# EAGLE board apex-alpha-ii-aaa-version (EAGLE 6.3)
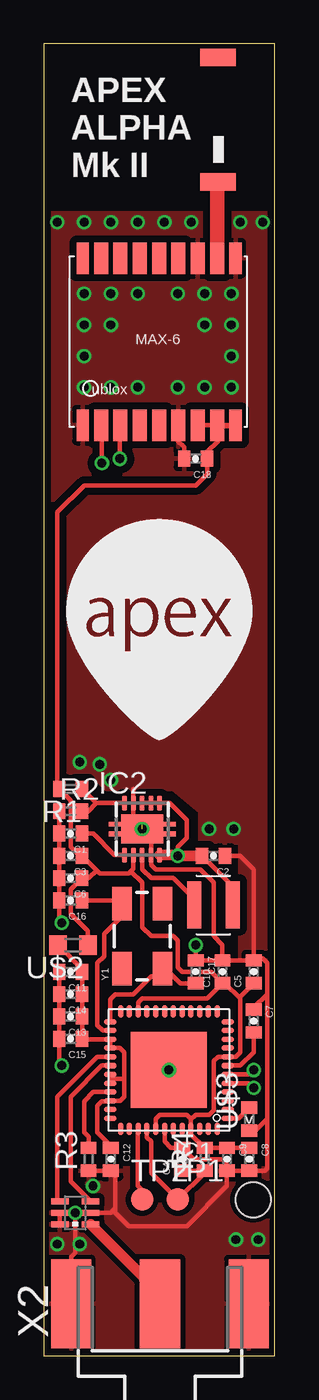
[diagram p0: board, top side]
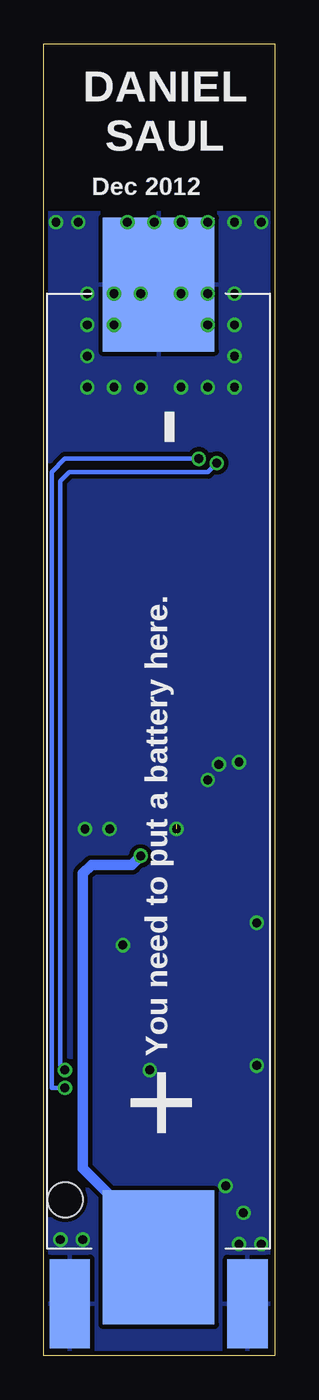
[diagram p1: board, bottom side, seen from below]

Size 13.13 x 74.67 mm. Coordinates in mm from the lower left corner, seen from the top.
Outline: 0,0 13.13,0 13.13,74.67 0,74.67 0,0
Copper layers (1*16): Top 0.035mm / dielectric 1.5mm / Bottom 0.035mm
Design rules "default *": minimum track width 10mil, minimum drill 12mil, track to track 8mil, track to pad 6mil, pad to pad 6mil, via to via 6mil, smd to smd 0mil, copper to edge 10mil, drill to drill 10mil, minimum pad ring 10mil, minimum via ring 6mil, stop-mask expansion 2mil, vias tented up to drill 100mil, thermal gap 10mil

## Footprints (pad centres in the part's own frame; a part is rotated, then mirrored left to right if it is on the bottom)
SMD-BATTERY-HOLDER-AAA = smd 7.62 x 6.35: +V -27.686,0; GND 27.686,0 | hole 2: -24.397,5.309
0402-CAP = smd 0.7 x 0.9: 1 -0.65,0; 2 0.65,0
2450BM15A0002 = smd 0.35 x 1: 1 -0.65,-0.875; 2 0,-0.875; 3 0.65,-0.875; 4 0.65,0.875; 5 0,0.875; 6 -0.65,0.875
UBLOX_MAX-6 = smd 1.8 x 0.7: 1_GND 4.95,-4.4; 9_V_RESET 4.95,4.3; 10_GND -4.55,4.3; 18_RESERVED -4.55,-4.4 | smd 1.8 x 0.8: 2_TXD1 4.95,-3.35; 3_RXD1 4.95,-2.25; 4_TIMEPULSE 4.95,-1.15; 5_EXTINT0 4.95,-0.05; 6_V_BCKP 4.95,1.05; 7_VCC_IO 4.95,2.15; 8_VCC 4.95,3.25; 11_RF_IN -4.55,3.25; 12_GND -4.55,2.15; 13_ANTON -4.55,1.05; 14_VCC_RF -4.55,-0.05; 15_RESERVED -4.55,-1.15; 16_SDA2 -4.55,-2.25; 17_SCL2 -4.55,-3.35
RGZ48 = smd 0.7 x 0.3: 1 -3.35,2.75; 2 -3.35,2.25; 3 -3.35,1.75; 4 -3.35,1.25; 5 -3.35,0.75; 6 -3.35,0.25; 7 -3.35,-0.25; 8 -3.35,-0.75; 9 -3.35,-1.25; 10 -3.35,-1.75; 11 -3.35,-2.25; 12 -3.35,-2.75; 25 3.35,-2.75; 26 3.35,-2.25; 27 3.35,-1.75; 28 3.35,-1.25; 29 3.35,-0.75; 30 3.35,-0.25; 31 3.35,0.25; 32 3.35,0.75; 33 3.35,1.25; 34 3.35,1.75; 35 3.35,2.25; 36 3.35,2.75 | smd 0.3 x 0.7: 13 -2.75,-3.35; 14 -2.25,-3.35; 15 -1.75,-3.35; 16 -1.25,-3.35; 17 -0.75,-3.35; 18 -0.25,-3.35; 19 0.25,-3.35; 20 0.75,-3.35; 21 1.25,-3.35; 22 1.75,-3.35; 23 2.25,-3.35; 24 2.75,-3.35; 37 2.75,3.35; 38 2.25,3.35; 39 1.75,3.35; 40 1.25,3.35; 41 0.75,3.35; 42 0.25,3.35; 43 -0.25,3.35; 44 -0.75,3.35; 45 -1.25,3.35; 46 -1.75,3.35; 47 -2.25,3.35; 48 -2.75,3.35 | smd 4.318 x 4.318: TP 0,0
S-PDSO-N10 = smd 0.28 x 0.85: 1 -1,-1.475; 2 -0.5,-1.475; 3 0,-1.475; 4 0.5,-1.475; 5 1,-1.475; 6 1,1.475; 7 0.5,1.475; 8 0,1.475; 9 -0.5,1.475; 10 -1,1.475 | smd 2.4 x 1.65: PP 0,0 | smd 3.8 x 0.28: PP@1 0,0.275; PP@2 0,-0.275
NR3015 = smd 0.8 x 2.7: P$1 1.1,0; P$2 -1.1,0
R0402 = smd 0.7 x 0.9: 1 -0.65,0; 2 0.65,0
B1,27 = smd 1.27 x 1.27: TP 0,0
JTI_ANTENNA-1575AT43A40 = smd 1 x 2: FEED -3.81,-1.27; NC 3.29,-1.27
R0603 = smd 1 x 1.1: 1 -0.85,0; 2 0.85,0
J502-ND-142-0701-801/806 = smd 5.08 x 2.286: 1 2.565,0; G@1 2.565,5.055; G@2 2.565,-5.055 | smd 5.08 x 2.286 bottom: G@3 2.565,5.055; G@4 2.565,-5.055
CRYSTAL-SMD-5X3 = smd 1.9 x 1.1: 1 -1.85,-1.15; 2 1.85,-1.15; 3 1.85,1.15; 4 -1.85,1.15

## Placement (x,y rotation side)
AAA  [SMD-BATTERY-HOLDER-AAA]  6.6,33.27 90 bottom
C1  1uF  [0402-CAP]  1.52,29.72 180 top
C2  10uF  [0402-CAP]  9.65,28.45 180 top
C3  10uF  [0402-CAP]  1.52,28.45 180 top
C4  2.2nF  [0402-CAP]  7.87,11.18 90 top
C5  100nF  [0402-CAP]  11.94,21.84 90 top
C6  100nF  [0402-CAP]  1.52,27.18 180 top
C7  470nF  [0402-CAP]  11.94,19.05 270 top
C8  100nF  [0402-CAP]  11.68,11.18 270 top
C9  10uF  [0402-CAP]  10.41,11.18 270 top
C10  10uF  [0402-CAP]  10.16,21.84 90 top
C11  100nF  [0402-CAP]  1.52,21.84 180 top
C12  100nF  [0402-CAP]  3.81,11.18 270 top
C13  100nF  [0402-CAP]  1.52,19.3 180 top
C14  2pF  [0402-CAP]  1.52,20.57 180 top
C15  2pF  [0402-CAP]  1.52,18.03 180 top
C16  27pF  [0402-CAP]  1.52,25.91 180 top
C17  27pF  [0402-CAP]  8.64,21.84 270 top
C18  100nF  [0402-CAP]  8.64,51.05 180 top
F1  0433BM15A0001  [2450BM15A0002]  1.78,8.13 90 top
GPS  UBLOX_MAX-6  [UBLOX_MAX-6]  6.6,57.91 270 top
IC1  CC430F5135  [RGZ48]  7.11,16.26 180 top
IC2  TPS61200  [S-PDSO-N10]  5.59,29.97 0 top
NR3015  2.2uH  [NR3015]  9.65,25.65 0 top
R1  560k  [R0402]  1.52,32.26 180 top
R2  200k  [R0402]  1.52,30.99 0 top
R3  56k  [R0402]  2.54,11.18 90 top
R4  47k  [R0402]  9.14,11.18 90 top
TP1  PTR1B1,27  [B1,27]  7.62,8.89 0 top
TP2  PTR1B1,27  [B1,27]  5.59,8.89 0 top
U$1  JTI_ANTENNA-1575AT43A40  [JTI_ANTENNA-1575AT43A40]  8.64,70.61 90 top
U$2  EXC3BB601H  [R0603]  1.65,23.37 180 top
U$3  STATUS  [R0402]  11.68,13.46 90 top
U$4  [APEXHAB-LOGO-SMALL]  1.27,35.05 0 top
X2  [J502-ND-142-0701-801/806]  6.6,0.38 90 top
Y1  26MHz  [CRYSTAL-SMD-5X3]  5.59,23.88 90 top

## Library data of the parts
AAA C1-C18 NR3015 R1-R4 U$2 U$3 = apex
F1 = johanson-technology
GPS U$1 = Ava
IC1 = TI_MSP430_v16
IC2 = texas; MPN: TPS61200DRCT; OC_FARNELL: 1471238; OC_NEWARK: 37M0066
TP1 TP2 = testpad
U$4 = !danielparts
X2 = !danielparts; MF: JOHNSON COMPONENTS; MPN: 142-0701-801; OC_FARNELL: 1608592; OC_NEWARK: 90F2624
Y1 = SparkFun

## Nets
GND: AAA.GND C1.2 C2.1 C3.2 C4.2 C5.2 C6.2 C7.1 C8.2 C9.2 C10.2 C11.2 C12.2 C13.2 C14.2 C15.2 C16.2 C17.1 C18.2 F1.2 F1.5 F1.6 GPS.1_GND GPS.6_V_BCKP GPS.10_GND GPS.12_GND IC1.42 IC1.TP IC2.4 IC2.9 IC2.PP IC2.PP@1 IC2.PP@2 R2.1 R3.1 U$3.1 X2.G@1 X2.G@2 X2.G@3 X2.G@4
GPSRX: GPS.3_RXD1 IC1.5
GPSTX: GPS.2_TXD1 IC1.6
N$1: AAA.+V C2.2 IC2.5 IC2.6 IC2.7 IC2.8 NR3015.P$1
N$2: F1.3 IC1.30
N$3: IC2.3 NR3015.P$2
N$4: IC2.10 R1.1 R2.2
N$5: C1.1 IC2.1
N$6: F1.4 IC1.29
N$7: F1.1 X2.1
N$8: GPS.11_RF_IN U$1.FEED
N$9: IC1.33 R3.2
N$10: C7.2 IC1.7
N$11: C4.1 IC1.40 R4.1 TP1.TP
N$12: IC1.39 TP2.TP
N$13: C17.2 IC1.25 Y1.1
N$14: C16.1 IC1.26 Y1.3
N$15: IC1.1 U$3.2
VCC: C3.1 C5.1 C6.1 C8.1 C9.1 C10.1 C18.1 GPS.7_VCC_IO GPS.8_VCC GPS.9_V_RESET IC1.8 IC1.22 IC1.41 IC1.45 IC2.2 R1.2 R4.2 U$2.1
VEE: C11.1 C12.1 C13.1 C14.1 C15.1 IC1.27 IC1.28 IC1.31 IC1.32 IC1.34 U$2.2

## Tracks (layer width: path | path; a pad name or v marks a point on that pad's centre or on a via)
GND  (via drill 0.51)  (2 unrouted)
  Top 0.254: C18.2 7.99,51.7 7.62,52.07 7.62,52.93 GPS.6_V_BCKP | v1.78,8.13 F1.5 F1.6 | R2.1 C1.2 C3.2 C6.2 C16.2 0.87,24.78 v1.02,24.64 | IC2.4 6.1,29.46 5.09,30.47 IC2.9 5.09,32.25 5.08,32.26 | IC2.PP 5.59,29.72 6.1,29.21 6.1,27.94 6.35,27.69 8.89,27.69 9.65,26.92 9.65,23.88 10.16,23.37 C10.2 | C7.1 11.94,19.81 12.7,20.57 | 12.7,20.57 12.7,22.35 12.45,22.61 12.05,22.61 C5.2 | 6.86,16.01 IC1.TP | 4.06,8.38 3.81,8.13 F1.2 v1.78,8.13 | R3.1 C12.2 4.06,10.27 4.06,8.38 | C9.2 C8.2 | IC1.42 6.86,12.19 7.23,11.83 C4.2 8.52,11.18 10.16,11.18 10.41,10.92 C9.2 | C9.2 12.56,10.53 12.7,10.67 12.7,13.46 | 12.7,13.46 12.7,20.57 | C17.1 8.64,22.61 | 8.64,22.61 v8.64,23.37 | C10.2 C5.2 | X2.G@1 1.55,5.61 1.78,5.84 v1.78,8.13 | 4.06,8.38 4.06,8.13 4.83,7.37 8.13,7.37 10.41,9.65 C9.2 | C10.2 8.75,22.49 8.64,22.61 | C11.2 C14.2 C13.2 C15.2 0.87,16.65 v1.02,16.51 | C2.1 11.18,28.45 11.94,27.69 C5.2 | U$3.1 12.05,12.81 12.7,13.46
  Bottom 0.254: AAA.GND 6.6,60.31 GPS.12_GND
  other vias: 0.76,64.52 2.29,64.52 3.81,64.52 5.33,64.52 6.86,64.52 8.38,64.52 11.18,64.52 12.45,64.52 2.29,60.45 2.29,58.67 2.29,56.9 2.29,55.12 5.33,55.12 7.62,55.12 9.14,55.12 10.67,55.12 10.67,56.9 10.67,58.67 10.67,60.45 3.81,60.45 5.33,60.45 7.62,60.45 9.14,60.45 3.81,58.67 9.14,58.67 3.81,55.12 12.19,6.6 10.92,6.6 0.76,6.35 2.03,6.35 2.79,9.65 7.11,16.26 9.4,29.97 10.79,29.97 3.81,32.77 3.17,33.66 2.03,33.78 5.59,29.97
  pour Bottom (isolate 0.254): 0,65.02 13.21,65.02 13.21,-5.08 0,-5.08
  pour Top (isolate 0.406): 0,65.02 13.21,65.02 12.95,22.61 11.18,22.61 11.18,29.21 8.89,29.21 8.89,30.99 7.37,32.26 3.56,32.26 2.79,33.02 0,33.02
  pour Top (isolate 0.305, rank 2): 0,10.67 13.21,10.67 13.21,-0.25 0,-0.25
GPSRX  (via drill 0.51)
  Top 0.254: IC1.5 11.67,15.51 v11.94,15.24 | v4.32,51.05 4.32,52.93 GPS.3_RXD1
  Bottom 0.254: v11.94,15.24 12.7,15.24 12.7,50.29 11.94,51.05 v4.32,51.05
GPSTX  (via drill 0.51)
  Top 0.254: IC1.6 11.69,16.01 v11.94,16.26 | v3.3,50.8 3.3,52.91 GPS.2_TXD1
  Bottom 0.254: v11.94,16.26 12.19,16.51 12.19,49.78 11.68,50.29 3.81,50.29 v3.3,50.8
N$1  (via drill 0.51)
  Top 0.254: IC2.8 IC2.7 IC2.6 7.16,31.45 8.13,30.48 8.13,29.46 7.62,28.96 v7.62,28.45 | NR3015.P$1 10.75,26.7 C2.2
  Top 0.61: C2.2 v7.62,28.45 7.57,28.5 arc1 IC2.5
  Bottom 0.61: AAA.+V 6.6,6.35 10.92,10.67 10.92,27.43 10.41,27.94 8.13,27.94 v7.62,28.45
N$2
  Top 0.254: IC1.30 3.3,16.51 1.52,14.73 1.52,9.91 F1.3
N$3
  Top 0.254: NR3015.P$2 8.55,25.99 7.37,27.18 6.1,27.18 5.59,27.69 IC2.3
N$4
  Top 0.254: IC2.10 2.98,31.45 | 2.98,31.45 R1.1 | R2.2 2.53,30.99 2.98,31.45
N$5
  Top 0.254: IC2.1 4.01,28.5 2.79,29.72 C1.1
N$6
  Top 0.254: IC1.29 3.57,17.01 3.56,17.02 3.05,17.02 0.76,14.73 0.76,8.92 F1.4 0.79,8.89 0.76,8.89
N$7
  Top 0.61: 5.81,4.32 F1.1
  Top 0.813: X2.1 6.6,4.32 5.81,4.32
N$8
  Top 0.254: 9.85,66.75 U$1.FEED
  Top 0.813: GPS.11_RF_IN 9.85,66.75
N$9
  Top 0.254: IC1.33 2.81,15.01 2.29,14.48 2.29,12.7 2.54,12.45 R3.2
N$10
  Top 0.254: C7.2 11.94,17.27 11.18,16.51 IC1.7
N$11
  Top 0.254: IC1.40 5.86,12.43 6.1,12.19 6.1,10.41 TP1.TP 9.14,10.41 R4.1 C4.1
N$12
  Top 0.254: TP2.TP 5.59,9.4 5.33,9.65 5.33,12.88 IC1.39
N$13
  Top 0.254: IC1.25 3.76,20.27 4.06,20.57 5.08,20.57 6.1,21.59 6.3,21.59 Y1.1 6.92,21.84 7.11,21.84 7.76,21.19 C17.2
N$14
  Top 0.254: C16.1 4.26,25.91 Y1.3 4.44,25.01 3.43,24 3.43,22.73 3.05,22.35 3.05,18.8 3.34,18.51 IC1.26
N$15
  Top 0.254: IC1.1 11.08,13.51 U$3.2
VCC
  Top 0.254: 9.91,52.91 9.91,52.07 9.29,51.45 C18.1 9.29,50.18 8.64,49.53 2.29,49.53 0.76,48.01 0.76,32.37 R1.2 1.52,31.61 1.52,28.96 2.03,28.45 C3.1 2.99,27.63 | 9.91,52.91 GPS.8_VCC | GPS.7_VCC_IO GPS.9_V_RESET 10.85,52.91 9.91,52.91 | IC2.2 5.09,27.69 4.95,27.56 | 4.95,27.56 4.83,27.43 3.19,27.43 2.99,27.63 | 2.99,27.63 2.54,27.18 C6.1 1.52,26.53 1.52,25.15 2.5,24.17 U$2.1 | 11.18,20.32 11.18,17.27 10.91,17.01 IC1.8 9.91,17.02 9.65,16.76 9.65,13.97 9.4,13.72 8.64,13.72 8.36,13.44 IC1.45 | 11.18,20.32 11.18,20.43 C5.1 | IC1.22 5.36,20.09 5.59,20.32 9.29,20.32 C10.1 | C10.1 10.3,21.19 11.18,20.32 | C8.1 C9.1 R4.2 8.36,12.61 IC1.45 | IC1.45 8.36,13.48 8.13,13.72 6.6,13.72 6.35,13.46 IC1.41 | 4.95,27.56 5.59,26.92 5.59,24.38 6.1,23.88 7.37,23.88 7.62,23.62 7.62,22.1 7.87,21.84 9.51,21.84 C10.1
VEE
  Top 0.254: IC1.31 IC1.32 3.77,15.49 3.77,15.71 3.81,15.75 4.57,15.75 | 4.57,15.75 4.57,14.73 4.35,14.51 IC1.34 3.73,14.48 3.3,14.48 3.05,14.22 3.05,12.7 3.81,11.94 C12.1 | 4.57,15.75 4.57,17.27 4.32,17.53 3.78,17.53 IC1.28 IC1.27 2.2,18.01 C15.1 C13.1 C14.1 C11.1 2.17,22 U$2.2

## Text on the board
tPlace: APEX / ALPHA / Mk II | >
bPlace: DANIEL | SAUL | Dec 2012 | You need to put a battery here.